# Altium PCB PCB_MCU.PcbDoc (part 2 of 2)
Units mil, origin at the board's own origin, x right, y up, seen from the top; angles counter-clockwise.
Board outline 6125 x 4280 mil, 4 copper layers (Top Layer, Layer 1, Layer 2, Bottom Layer), stack 64.567 mil thick; 69 components, 43 nets, 240 pads, 64 vias.
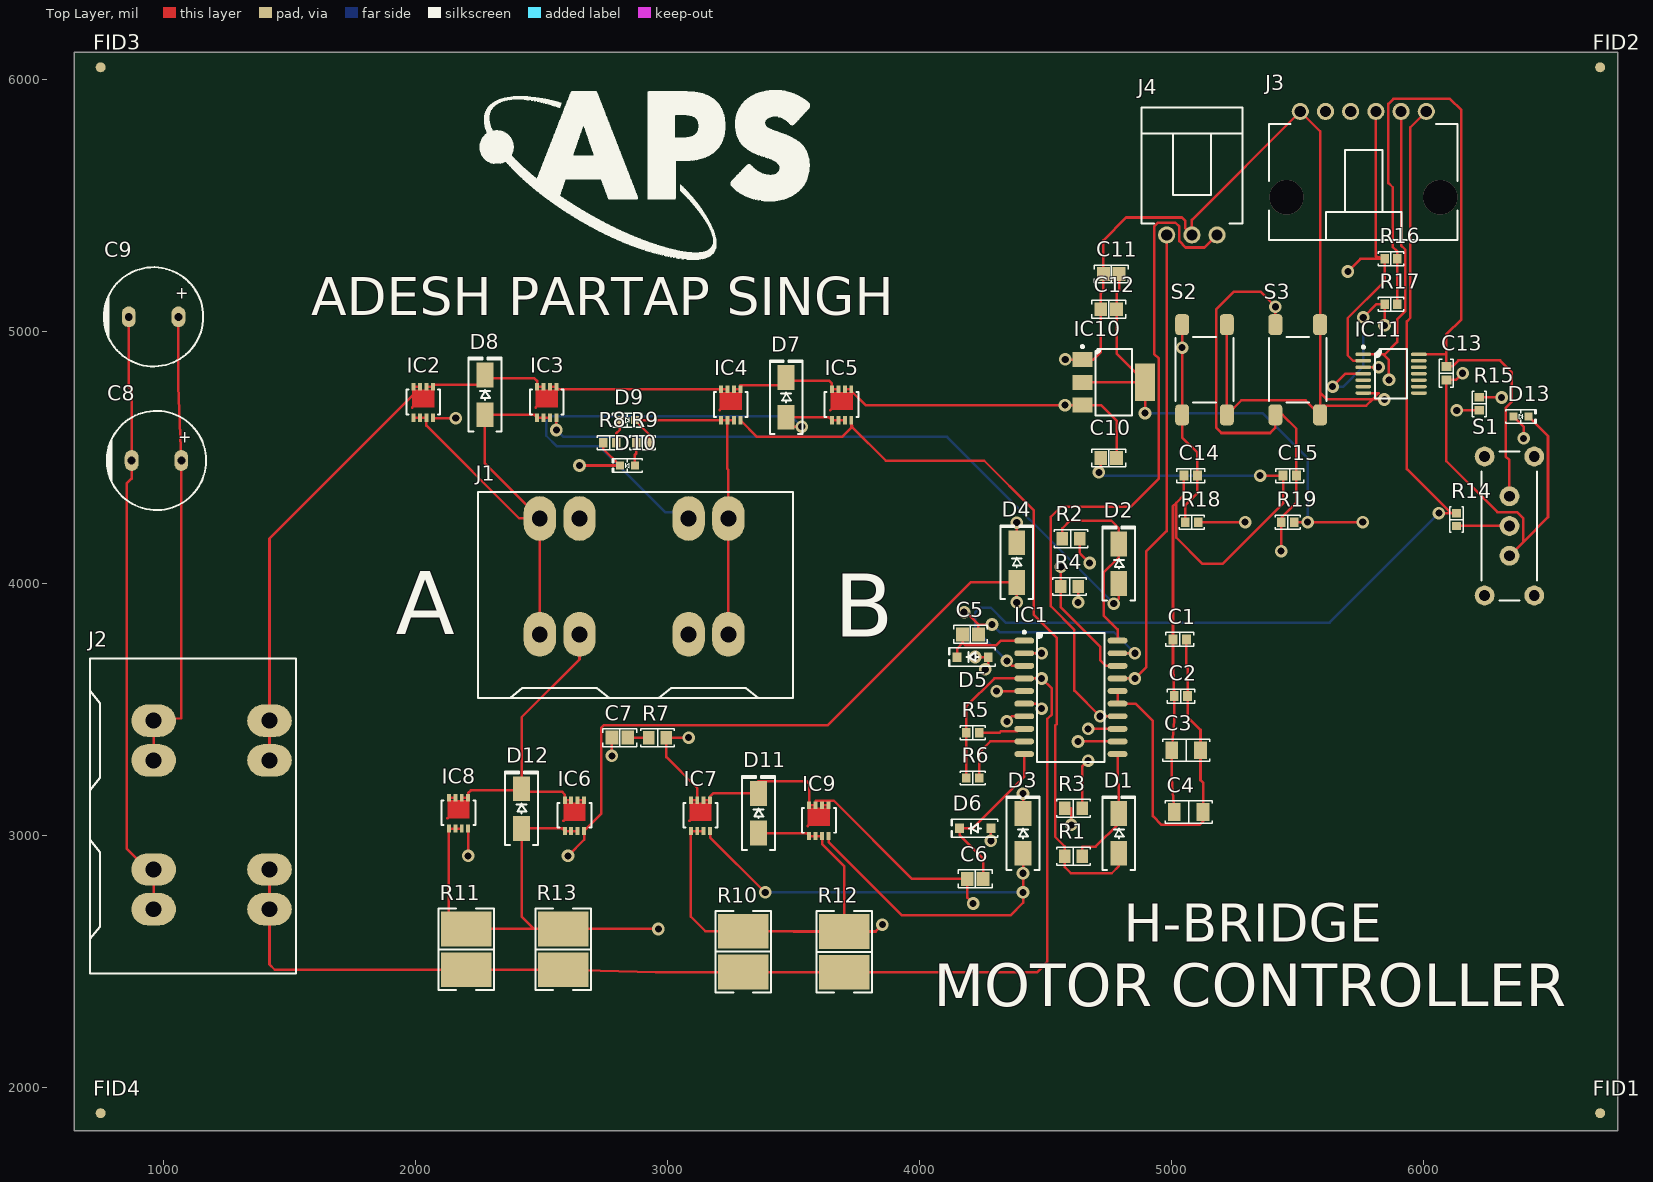
[diagram p0: Top Layer view]

## Via types
v1: diameter 50, hole 28, Top Layer to Bottom Layer, 62 vias
v2: diameter 135.83, hole 135.83, Top Layer to Bottom Layer, tented both sides, 2 vias

## Nets (pads, with @x,y where several pads share a name; then routed paths per layer and width w, separated by ;. In a path a pad name is that pad's centre, name@x,y a point inside that pad or via, vN(x,y) a via of type N, cw(c..) or ccw(c..) an arc to the next point about the centre after c; other vN are vias at no path point) (continued)
LOWIN_B: (continued)
  Layer 1 w10: v1(4305,3575) 4305,3740 4365,3800 4722,3800 5212,4290 5212,4356.72 v1(5638.5,4783.23)
  Layer 2 w10: J3.5 5660,5925 5740,5925 5760,5905 5760,5110.59 v1(5844.41,5026.18)
  Bottom Layer w10: v1(5638.5,4783.23) 5681.23,4783.23 5760,4862 v1(5760,5058)
LOWOUT_A: D3.2 IC1.13 R3.1 | length 833.3
  Top Layer w10: D3.2 v1(4410,3168) ; R3.1 4644.45,3275.45 v1(4668,3299) ; v1(4668,3425) IC1.13
  Layer 1 w10: v1(4410,3168) 4537,3168 v1(4668,3299)
  Layer 2 w10: v1(4668,3299) v1(4668,3425)
LOWOUT_B: D4.2 IC1.18 R4.1 | length 839.3
  Top Layer w10: D4.2 v1(4385,4243) ; v1(4560,4068) R4.1 4560,3907 4716,3751 4716,3699 4740,3675 IC1.18
  Layer 1 w10: v1(4385,4243) v1(4560,4068)
LOWSRC_A: D11.1 IC1.14 IC7.S IC9.S J4.3 R10.1 R12.1 | length 6040.8
  Top Layer w10: IC7.S@3142.8,3019.57 3117.2,3019.57 3091.61,3019.57 3091.61,2680 3149.8,2621.81 R10.1 3499.1,2621.81 3500,2620.91 R12.1 ; D11.1 3549.92,3011.26 3561.61,2999.57 3587.2,2999.57 3612.8,2999.57 3612.8,2968 3700,2880.8 R12.1 ; v1(3852,2648) 3824.91,2620.91 R12.1 ; IC1.14 v1(4716,3475) 4614,3577 4614,3818 4520,3912 4520,4266 4560,4306 4836,4306 4949,4419 4949,4894 4930,4913 4930,5418 4946.06,5434.06 5013.94,5434.06 5030,5418 5030,5360 5055,5335 5130,5335 J4.3
  Layer 1 w10: v1(3852,2648) 4200,2648 4252,2700 4252,2771 4716,3235 v1(4716,3475)
LOWSRC_B: D12.1 IC1.17 IC6.S IC8.S J4.1 R11.2 R13.2 | length 6172.4
  Top Layer w10: IC8.S@2182.8,3029.57 2157.2,3029.57 2131.61,3029.57 2131,3029.57 2131,2630.91 R11.2 2469.09,2630.91 ; IC6.S@2642.8,3019.57 2617.2,3019.57 2591.61,3019.57 2581.18,3030 D12.1 2420,2680 2469.09,2630.91 ; v1(2962.91,2630.91) R13.2 2469.09,2630.91 ; IC1.17 v1(4854,3625) 4898,3669 4898,4128 4980,4210 J4.1
  Layer 1 w10: v1(2962.91,2630.91) 3450.91,2630.91 4415,3595 4415,3640 4440,3665 4814,3665 v1(4854,3625)
NetC1_2: C1.2 C2.2 C3.2 C4.2 IC1.15 IC1.16 | length 1564.8
  Top Layer w10: IC1.16 IC1.15 4857,3525 4925,3457 4925,3079 4960,3044 5110,3044 5124.17,3058.17 C4.2 5124.17,3212 5114.17,3222 C3.2 5114.17,3421 5063.15,3472.02 C2.2 5063.15,3665 5058.15,3670 C1.2
NetC5_2: C5.2 D5.2 IC1.1 | length 355.7
  Top Layer w10: D5.2 4147.99,3743 4170,3765.01 4170,3767 ; C5.2 4170,3767 ; IC1.1 4322,3775 4304,3757 4180,3757 4170,3767
NetC6_2: C6.2 D6.2 IC1.10 | length 670.1
  Top Layer w10: C6.2 4251.5,2910 4157.99,3003.5 D6.2 4209,3030 4415,3236 IC1.10
NetC7_1: C7.1 R7.2 | length 84.1
  Top Layer w10: C7.1 R7.2
NetD9_1: D9.1 R8.1 | length 96.2
  Top Layer w10: R8.1 2795.59,4597 2810.47,4611.88 D9.1
NetD10_1: D10.1 R9.2 | length 92
  Top Layer w10: D10.1 2869.53,4512 2874.41,4516.88 R9.2
NetIC1_8: IC1.8 R5.2 | length 191.4
  Top Layer w10: R5.2 4317,3410 4322,3415 4386,3415 4386,3425 IC1.8
NetIC1_9: IC1.9 R6.2 | length 298.4
  Top Layer w10: R6.2 4235.59,3330.59 4280,3375 IC1.9
NetR14_1: R14.1 R15.1 S1.2 | length 844.4
  Top Layer w10: R14.1 S1.2 ; v1(6131,4688.82) R15.1
  Layer 2 w10: v1(6131,4688.82) 6131,4439 S1.2
NetTP3_1: 
NetTP4_1: 
NetTP5_1: 
NetTP6_1: 
NetTP7_1: 
NetTP8_1: 
NetTP9_1: 
NetTP10_1: 
NetTP11_1: 
NetTP12_1: 
NetTP13_1: 
NetTP14_1: 
NetTP15_1: 
pads on no net: FID1.F FID2.F FID3.F FID4.F IC11.5 IC11.6 IC11.8 IC11.9 IC11.10 IC11.11 IC11.12 IC11.13 S1.M
copper on no net:
  other v2: 5454.88,5534.84 6065.12,5534.84

## Silkscreen, mask and mechanical layers (free items; w line width, h text height)
Top Overlay:
  drawing of 3 lines, arcs and shapes, not listed
  text "ADESH PARTAP SINGH" at 1585.43,5065.43 h150
  text "A" at 1920,3800 h250
  text "B" at 3660,3790 h250
  text "H-BRIDGE" at 4810,2580 h150
  text "MOTOR CONTROLLER" at 4055,2325 h170

## Text inside footprints (layer, text, board x,y; h text height)
C8: Top Overlay "+" at 1058.19,4545.12 h78.74
C9: Top Overlay "+" at 1046.61,5115.12 h78.74